# Altium PCB ref.PcbDoc
Units mm, origin at the board's own origin, x right, y up, seen from the top; angles counter-clockwise.
Board outline 43.02 x 49.94 mm, 4 copper layers (Top Layer, Internal Plane 1, Internal Plane 2, Bottom Layer), stack 0.758 mm thick; 16 components, 64 nets, 36 pads, 153 vias.
Unrouted connection lines stored in the file: 2.
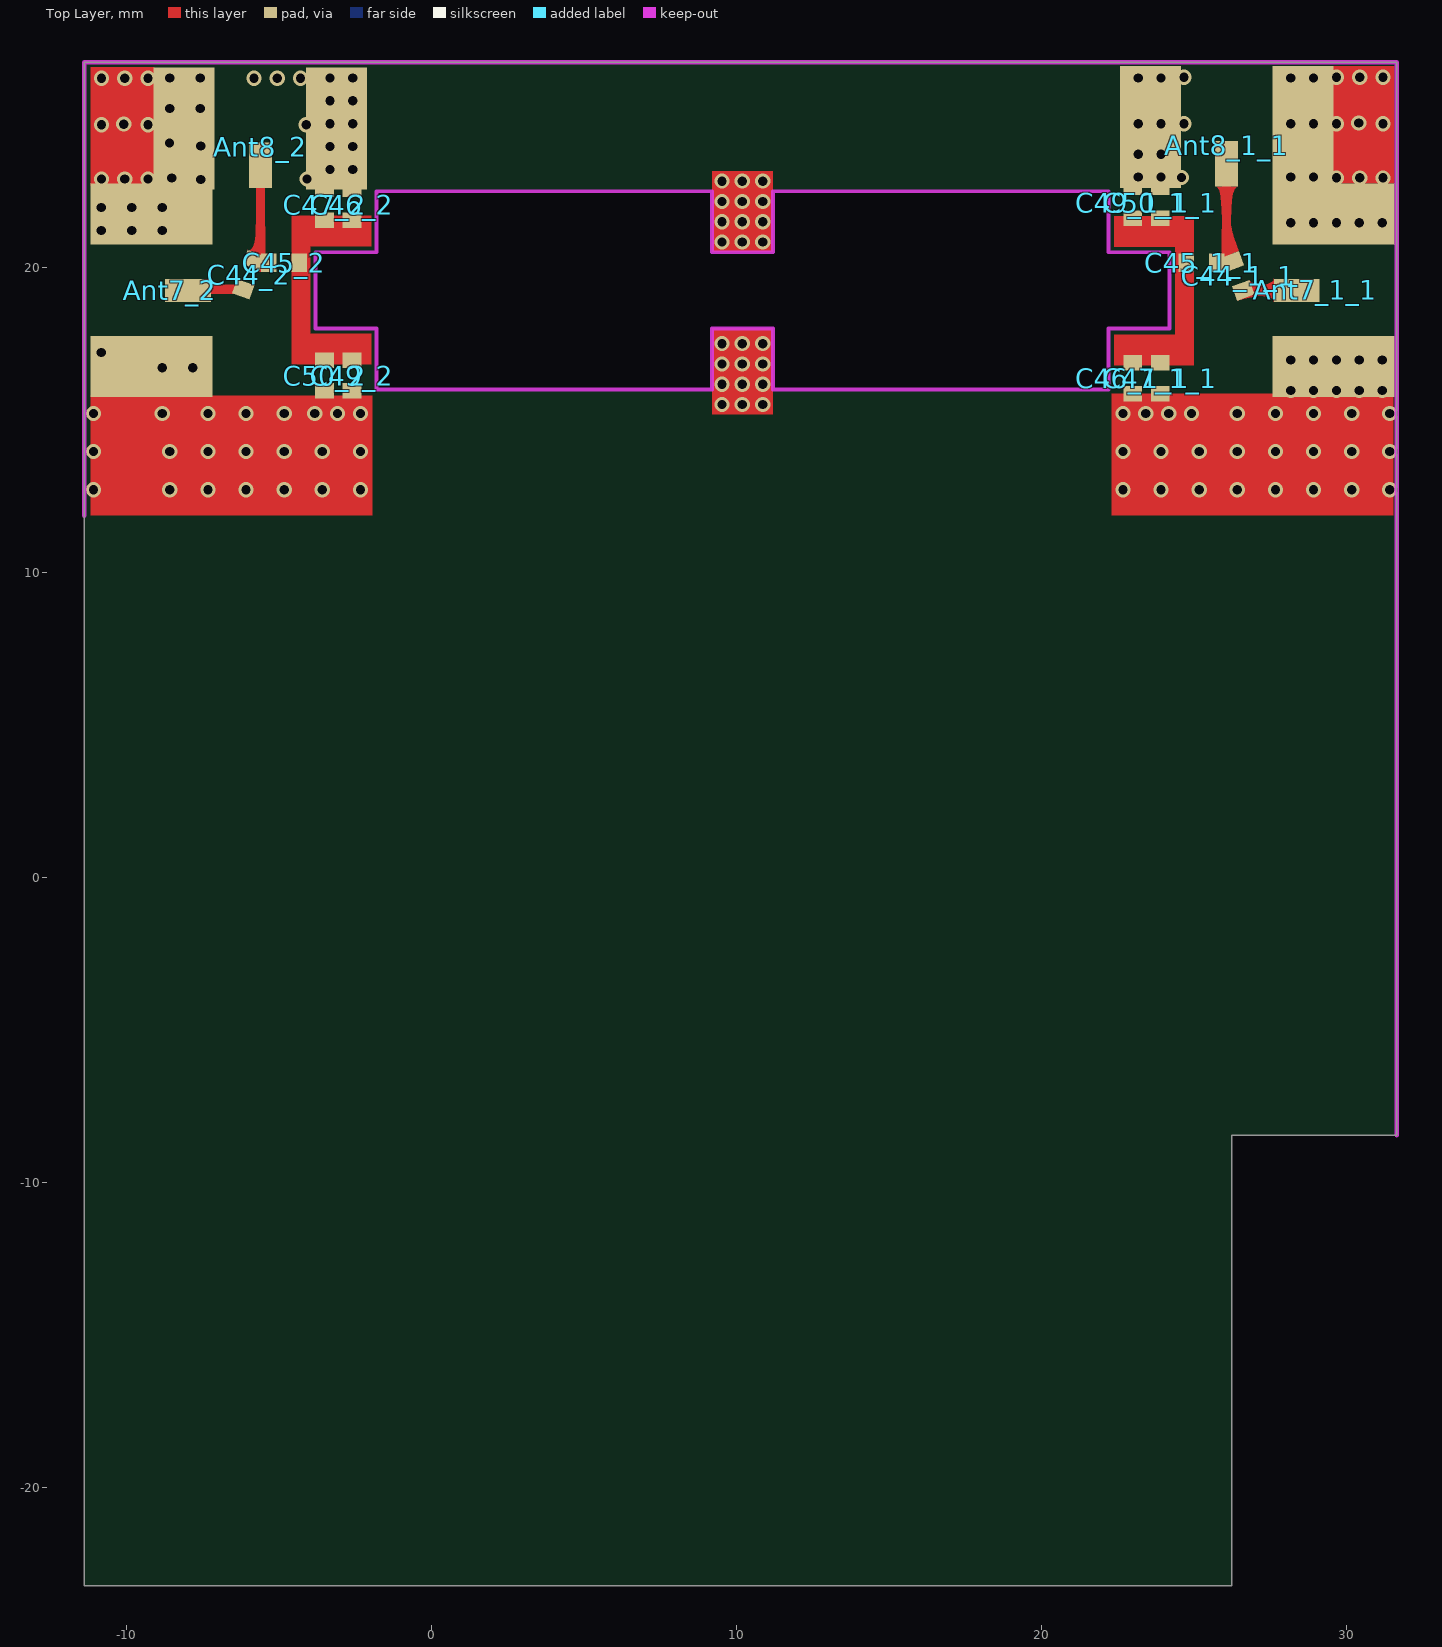
[diagram p0: Top Layer view]
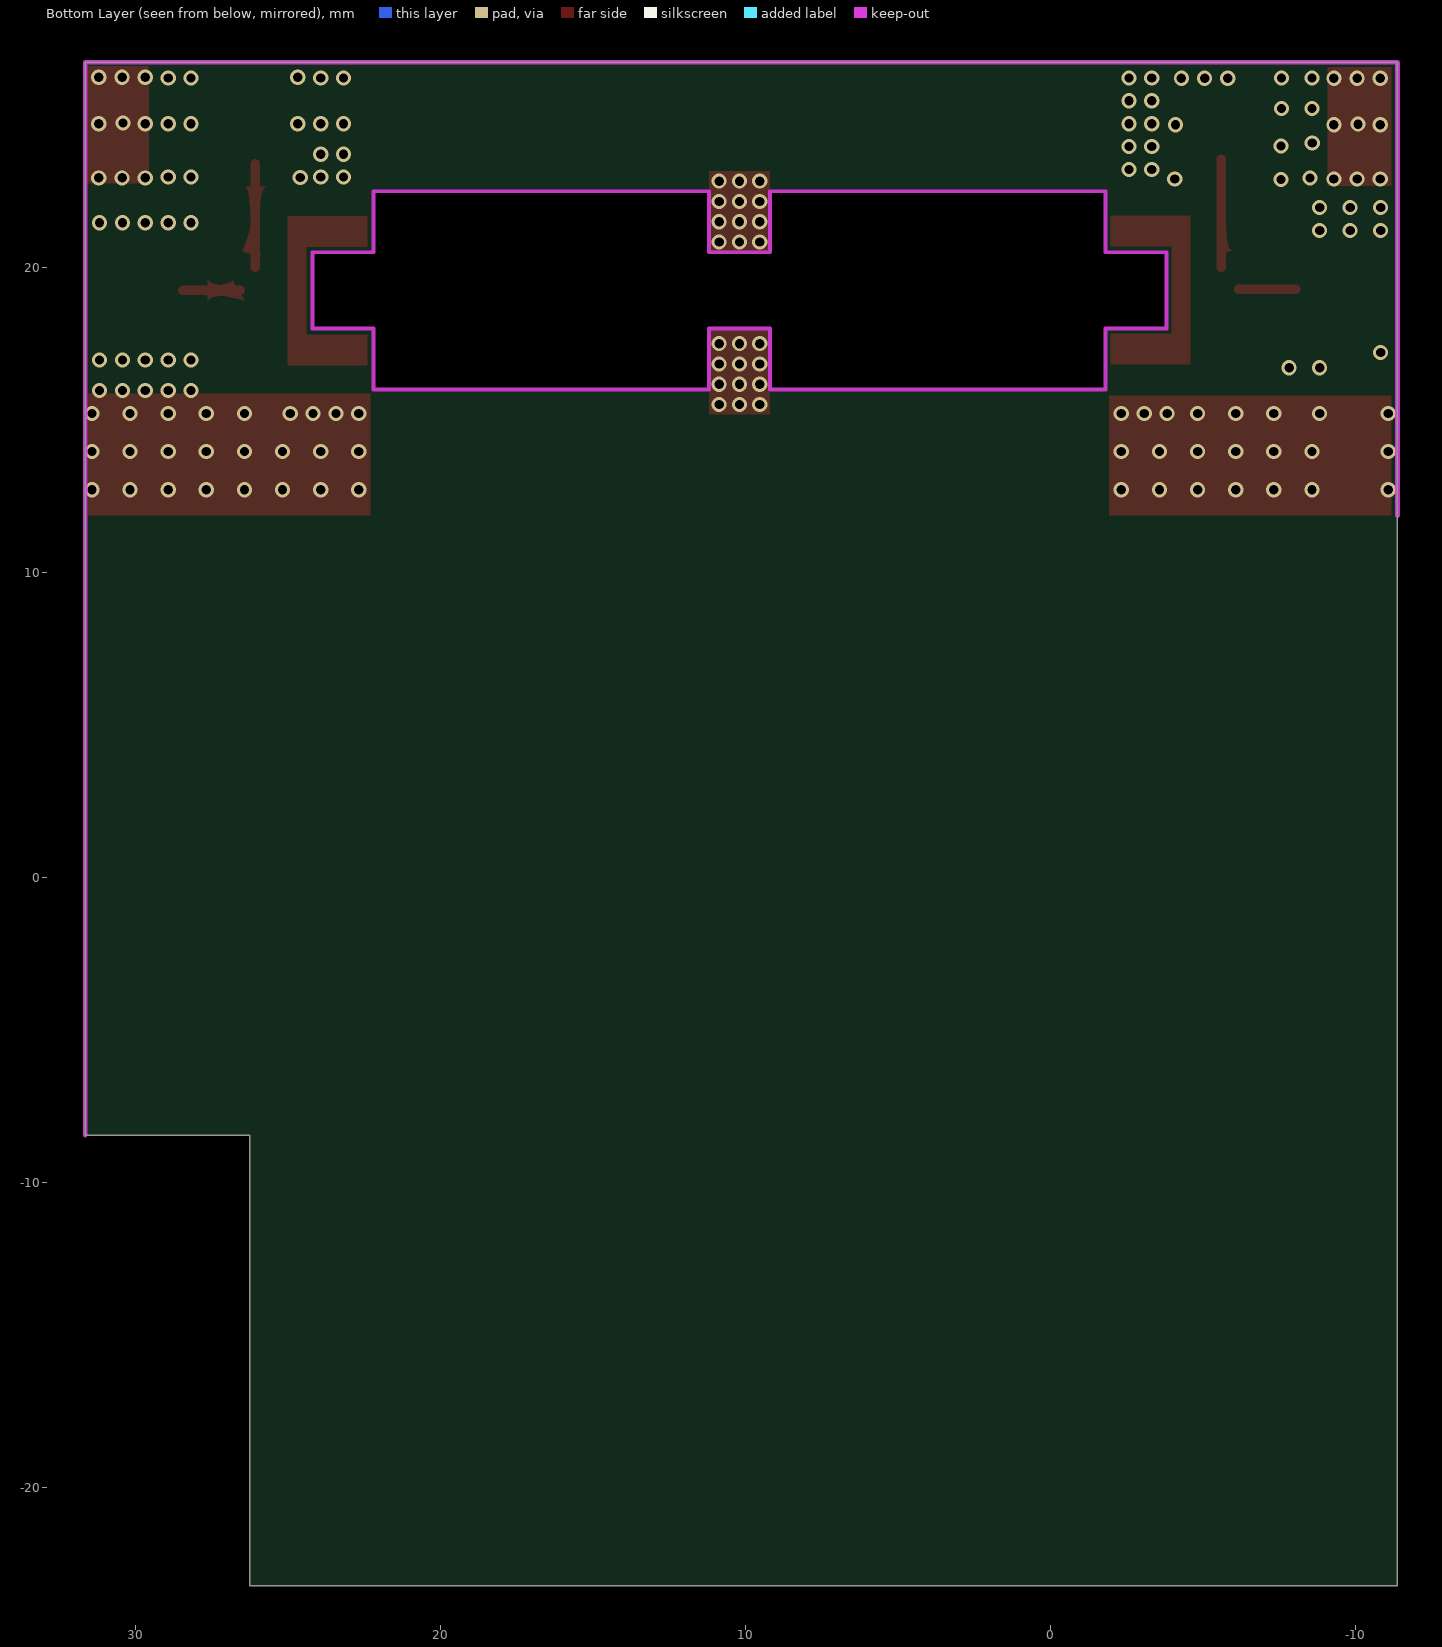
[diagram p1: Bottom Layer view, seen from below]
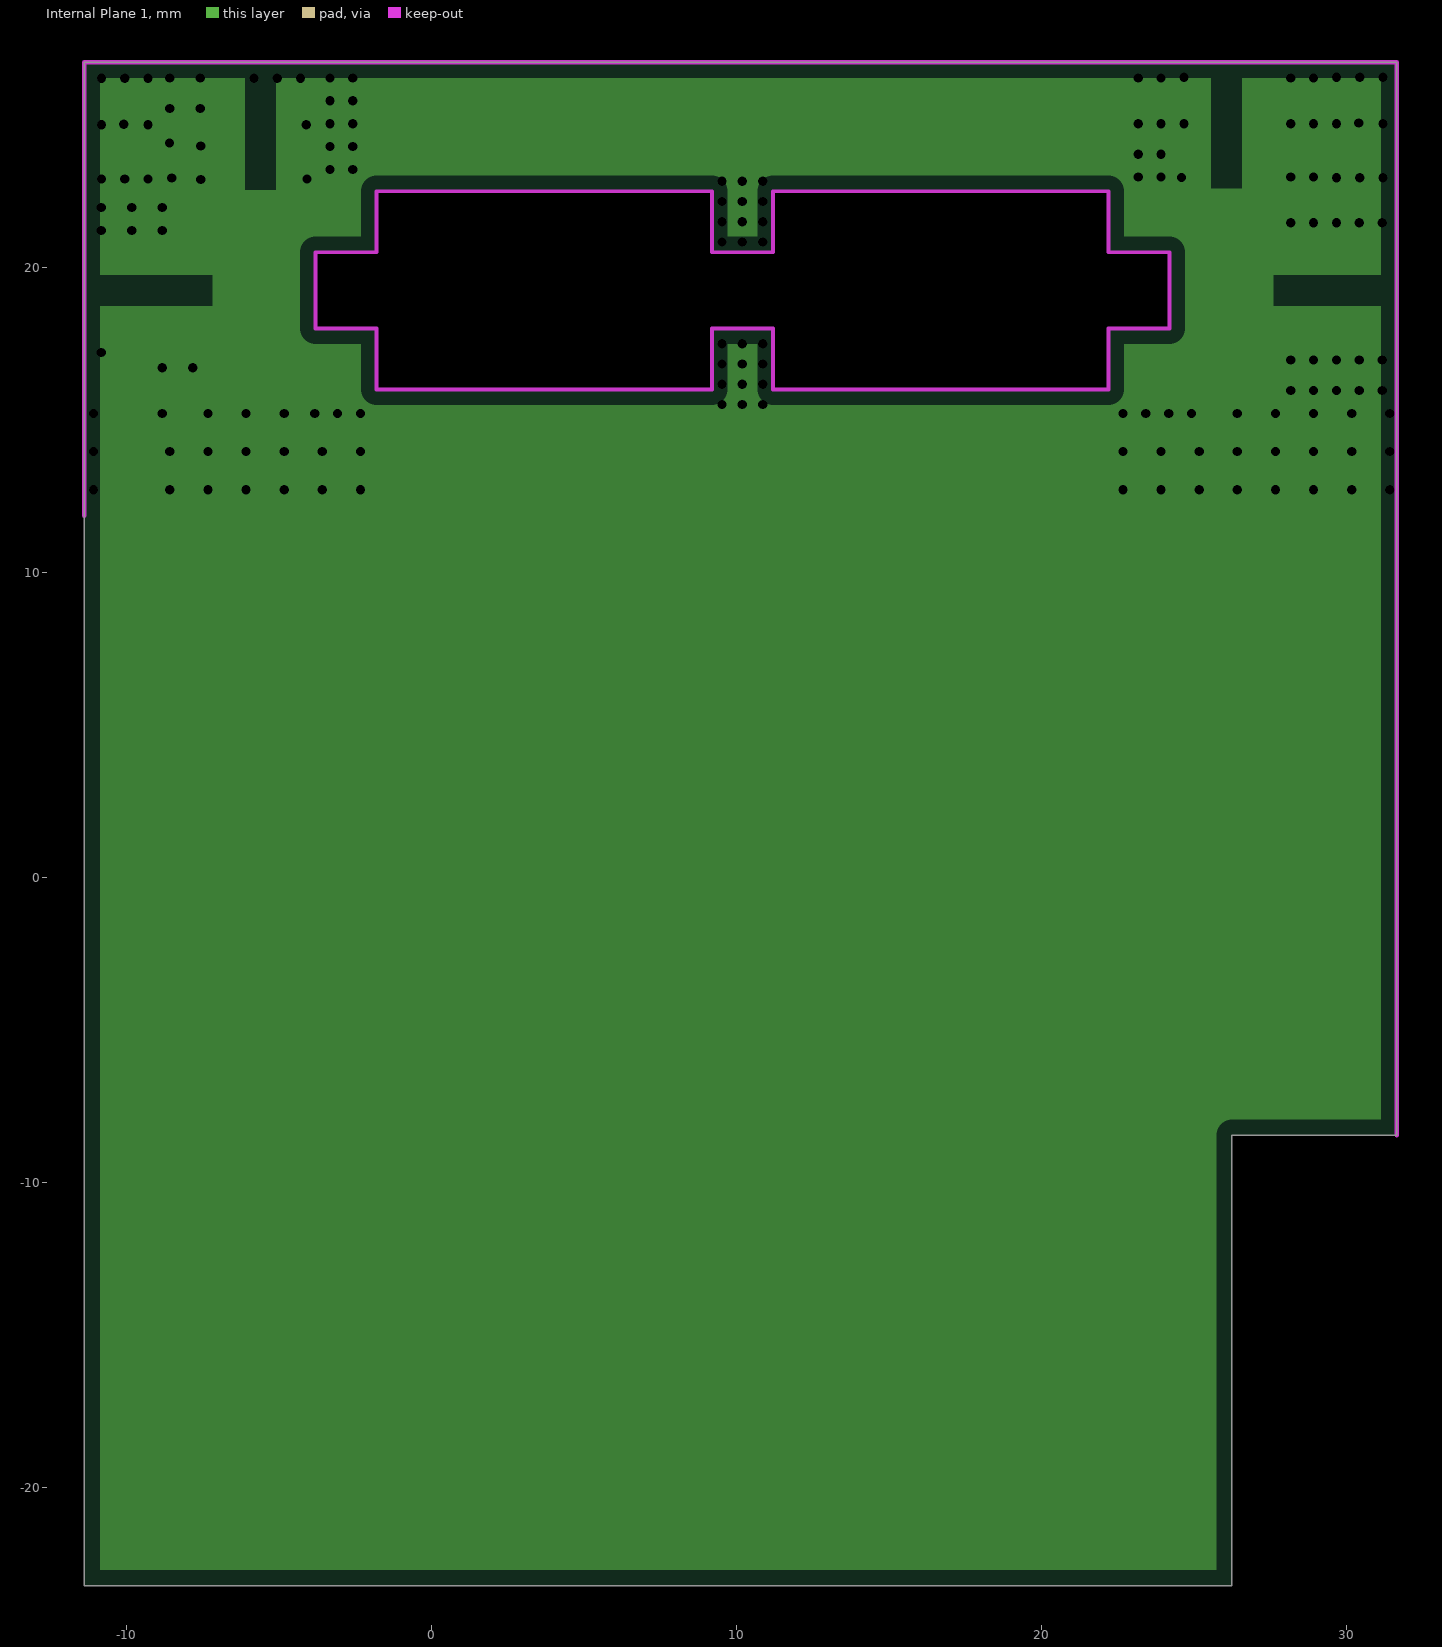
[diagram p2: Internal Plane 1, clearances drawn from the general rule]
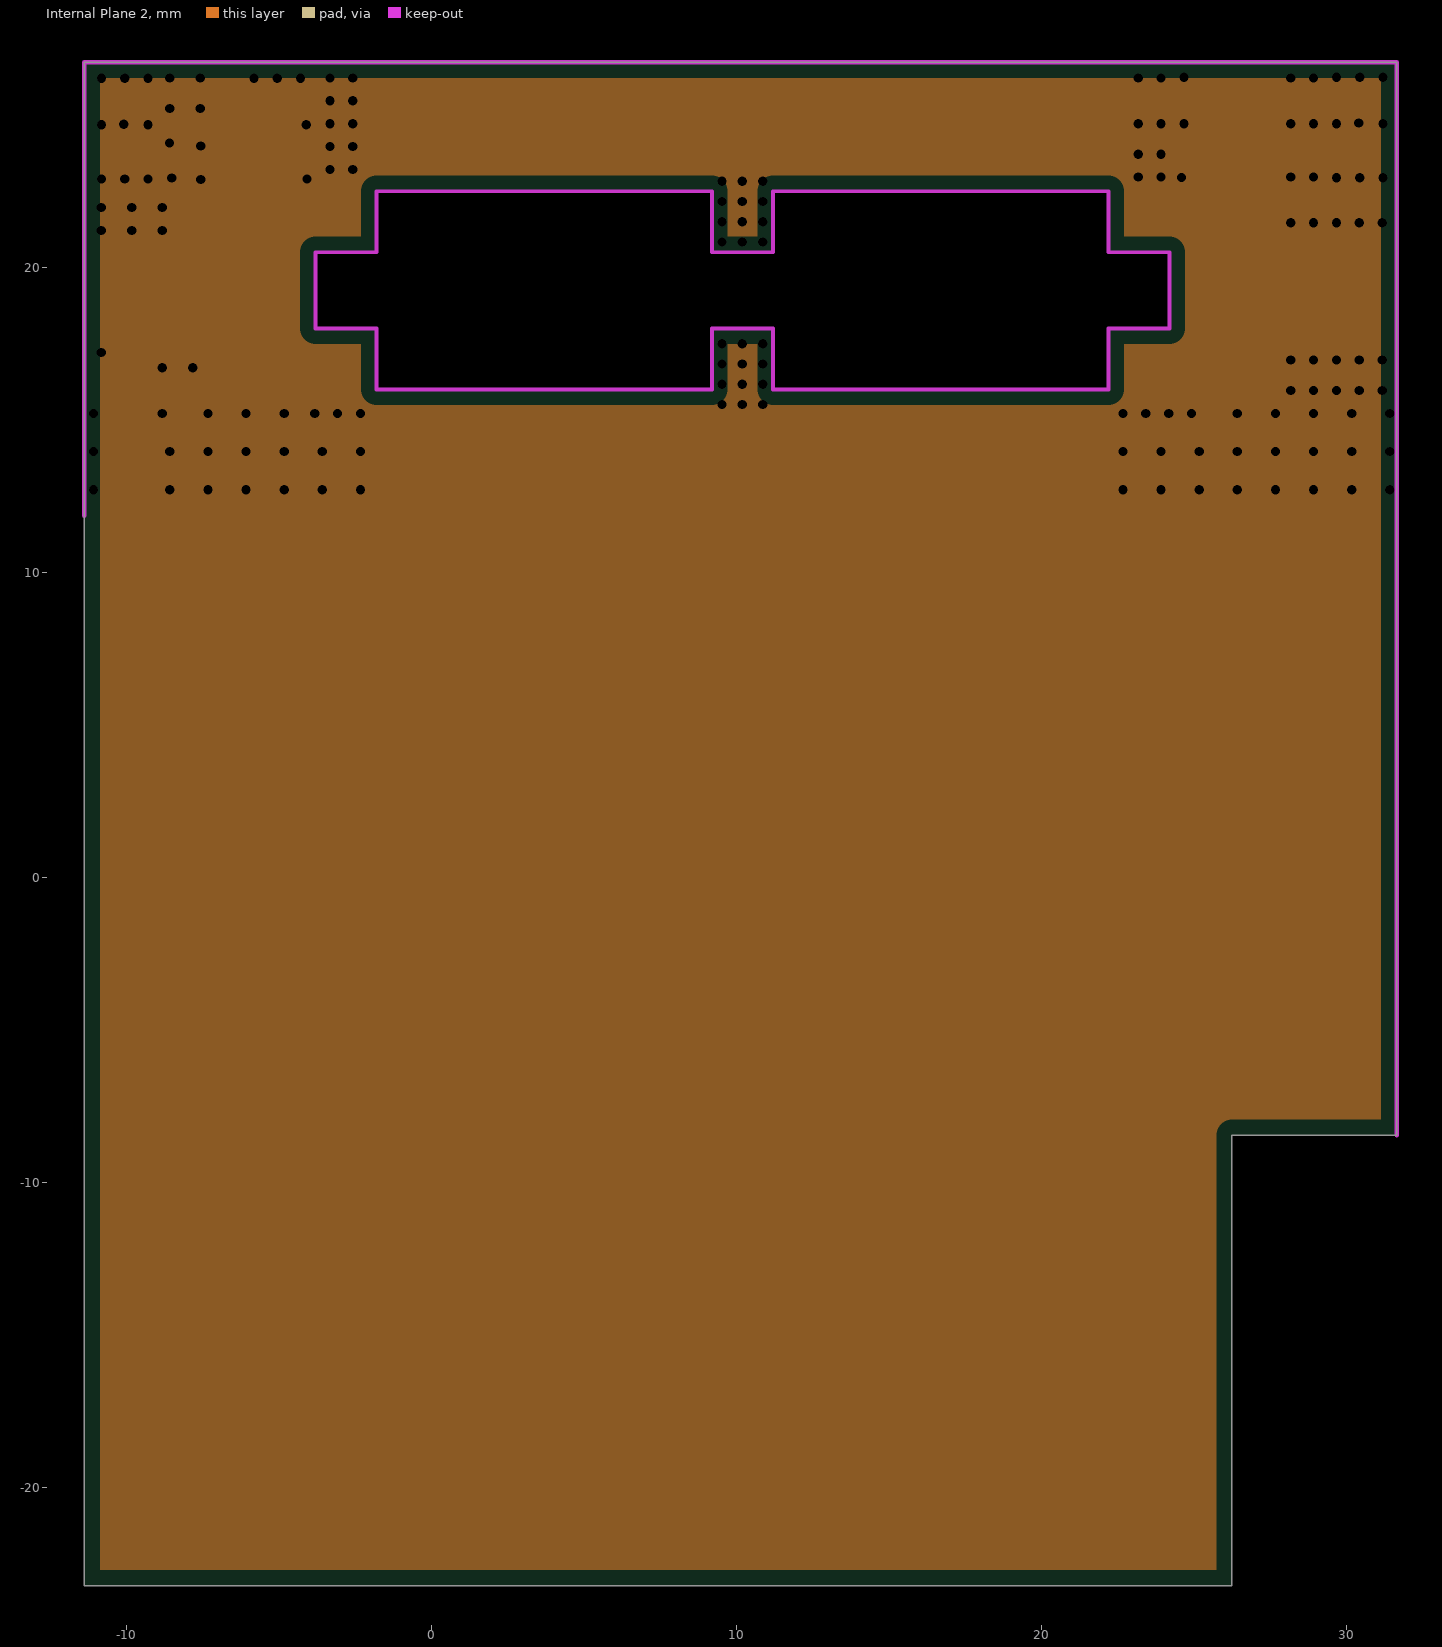
[diagram p3: Internal Plane 2, clearances drawn from the general rule]

## Layer stack, top to bottom
Top Solder: solder mask 0.0102, Solder Resist, Dk 3.8
Top Layer: signal copper 0.0356
Dielectric 1: prepreg 0.1803, Dk 4.6
Internal Plane 1: plane copper 0.036, net GND
Dielectric 3: core 0.254, Dk 4.6
Internal Plane 2: plane copper 0.036, net GND
Dielectric 4: prepreg 0.1803, Dk 4.6
Bottom Layer: signal copper 0.0356
Bottom Solder: solder mask 0.0102, Solder Resist, Dk 3.8

## Board outline
-11.391,-23.227 -11.391,26.717 31.634,26.717 31.634,-8.458 26.234,-8.458 26.234,-23.227
cut-out: 24.184,17.992 22.184,17.992 22.184,15.992 11.184,15.992 11.184,17.992 9.184,17.992 9.184,15.992 -1.816,15.992 -1.816,17.992 -3.816,17.992 -3.816,20.492 -1.816,20.492 -1.816,22.492 9.184,22.492 9.184,20.492 11.184,20.492 11.184,22.492 22.184,22.492 22.184,20.492 24.184,20.492

## Design rules (kind name [scope] priority, off if disabled: settings)
Clearance [All] p1: gap=0.152 ignorepadtopadclearanceinfootprint=FALSE except(0: Arc-Hole Track-Hole SMDPad-Hole THPad-Hole Via-Hole Fill-Hole Poly-Hole Region-Hole Text-Hole)
DiffPairsRouting [All] p1: maxlimit=0.254 minlimit=0.254 mostfreqgap=0.254 toplayer_minwidth=0.152 toplayer_maxwidth=0.381 toplayer_prefwidth=0.381 bottomlayer_minwidth=0.152 bottomlayer_maxwidth=0.381 bottomlayer_prefwidth=0.381 maxuncoupledlength=12.7
MinimumSolderMaskSliver [All] p1 off: minsoldermaskwidth=0.254
PlaneClearance [All] p1: clearance=0.254
PlaneConnect [All] p1: planeconnectstyle=Direct reliefexpansion=0.508 reliefentries=4 reliefconductorwidth=0.254 reliefairgap=0.254
PolygonConnect [All] p1: connectstyle=Direct reliefconductorwidth=0.254 reliefentries=4 polygonreliefangle="90 Angle" airgapwidth=0.254
RoomDefinition mixer [InComponentClass('mixer')] p1 off: confinementstyle=ConfineIn formatcopy=TRUE lockcomponents=FALSE outline 38.622,20.131 177.534,20.131 177.534,30.164 38.622,30.164
RoomDefinition power [InComponentClass('power')] p2 off: confinementstyle=ConfineIn formatcopy=TRUE lockcomponents=FALSE outline 38.52,-21.703 98.083,-21.703 98.083,-15.607 38.52,-15.607
RoutingVias [All] p1: holewidth=0.305 width=0.508 viastyle="Through Hole" minholewidth=0.3 minwidth=0.5 maxholewidth=0.711 maxwidth=1.27
SilkToBoardRegionClearance [All] p1 off:
SilkToSilkClearance [All] p1 off: silktosilkclearance=0.254
SilkToSolderMaskClearance [IsPad] p1 off: minsilkscreentomaskgap=0.254 clearancetoexposedcopper=TRUE
SolderMaskExpansion [All] p1: expansion=0.102
Width [All] p1: maxlimit=1.524 minlimit=0.152 preferedwidth=0.152
23 further rules are at their usual default settings.

## Classes and differential pairs
component class mixer: R28
differential pair IF1: +IF1_P -IF1_N
differential pair IF2: +IF2_P -IF2_N

## Components (designator, comment, footprint, x,y, rotation, side; value= is the part's Value field where it differs from the comment)
Ant7_1_1 "Antenna" SMA-2 29.559,16.742 r90 top (schematic designator Ant2)
Ant7_2 "Antenna" SMA-2 -9.191,21.742 r270 top (schematic designator Ant2)
Ant8_1_1 "Antenna" SMA-2 28.559,24.592 r180 top (schematic designator Ant2)
Ant8_2 "Antenna" SMA-2 -3.116,24.542 r180 top (schematic designator Ant2)
C44_1_1 "1nF" 0402 26.434,19.717 r290 top (schematic designator C43)
C44_2 "1nF" 0402 -6.007,19.75 r70 top (schematic designator C43)
C45_1_1 "1nF" 0402 25.234,20.142 r0 top (schematic designator C43)
C45_2 "1nF" 0402 -4.841,20.142 r180 top (schematic designator C43)
C46_1_1 "1nF" 0402 22.984,16.367 r270 top (schematic designator C43)
C46_2 "1nF" 0402 -2.616,22.042 r90 top (schematic designator C43)
C47_1_1 "1nF" 0402 23.884,16.367 r270 top (schematic designator C43)
C47_2 "1nF" 0402 -3.516,22.042 r90 top (schematic designator C43)
C49_1_1 "1nF" 0402 22.984,22.118 r270 top (schematic designator C43)
C49_2 "1nF" 0402 -2.616,16.442 r90 top (schematic designator C43)
C50_1_1 "1nF" 0402 23.884,22.118 r270 top (schematic designator C43)
C50_2 "1nF" 0402 -3.516,16.442 r90 top (schematic designator C43)

## Footprints (in the part's own frame and the unit in brackets; to place one, negate y for a bottom-side part, rotate by r counter-clockwise, add the part's x,y. Pads: shape width x height; smd on the part's side, far side on the other; paste and mask are expansions set on the pad)
0402 [mil] "0402-RES"
  rect 20x24 smd: 1(-19.68,0) 2(20,0)
SMA-2 [mm]
  rect 0.75x1.5 smd: 1(2.5,1.2)
  rect 2x4 smd: GND(0,0) GND(5,0)
  Top Layer pour cut-out: 1,2 4,2 4,-2 1,-2

## Part data
C44_1_1 C44_2 C45_1_1 C45_2 C46_1_1 C46_2 C47_1_1 C47_2 C49_1_1 C49_2 C50_1_1 C50_2: library part CAP0402-CAP, "<b>Capacitor</b> / Standard 0603 ceramic capacitor, and 0.1\" leaded capacitor."

## Via types
v1: diameter 0.5, hole 0.305, Top Layer to Bottom Layer, tented both sides, 149 vias
v2: diameter 0.5, hole 0.3, Top Layer to Bottom Layer, 4 vias

## Nets (pads, with @x,y where several pads share a name; then routed paths per layer and width w, separated by ;. In a path a pad name is that pad's centre, name@x,y a point inside that pad or via, vN(x,y) a via of type N, cw(c..) or ccw(c..) an arc to the next point about the centre after c; other vN are vias at no path point)
5V: 
5V-MIXER: Ant7_1_1.1 C44_1_1.2 | length 1.9
  Top Layer w0.305: C44_1_1.2@26.546,19.242 Ant7_1_1.1@28.434,19.242
5VA: 
5VB: 
6V: 
-3.3V: 
DETO: Ant8_1_1.1 C44_1_1.1 C44_2.2 C45_1_1.2 C45_2.2 | length 6.9
  Top Layer w0.305: C44_2.2@-5.616,19.992 -5.616,23.542 ; C44_1_1.1@26.059,19.992 Ant8_1_1.1
GND: Ant7_1_1.GND Ant7_2.GND Ant8_1_1.GND Ant8_2.1 Ant8_2.GND C46_1_1.2 C46_2.2 C47_1_1.2 C47_2.2 C49_1_1.1 C49_2.1 C50_1_1.1 C50_2.1
  other v1: -11.089,12.707 -8.589,12.707 -7.339,12.707 -6.089,12.707 -4.839,12.707 -3.589,12.707 -2.339,12.707 22.661,12.707 23.911,12.707 25.161,12.707 26.411,12.707 27.661,12.707 28.911,12.707 30.161,12.707 31.411,12.707 -11.089,13.957 -8.589,13.957 -7.339,13.957 -6.089,13.957 -4.839,13.957 -3.589,13.957 -2.339,13.957 22.661,13.957 23.911,13.957 25.161,13.957 26.411,13.957 27.661,13.957 28.911,13.957 30.161,13.957 31.411,13.957 -11.089,15.207 -8.839,15.207 -7.339,15.207 -6.089,15.207 -4.839,15.207 -3.839,15.207 -3.089,15.207 -2.339,15.207 22.661,15.207 23.411,15.207 24.161,15.207 24.911,15.207 26.411,15.207 27.661,15.207 28.911,15.207 30.161,15.207 31.411,15.207 9.517,15.497 10.183,15.497 10.849,15.497 28.161,15.957 28.911,15.957 29.661,15.957 30.411,15.957 31.161,15.957 9.517,16.163 10.183,16.163 10.849,16.163 -8.839,16.707 -7.839,16.707 9.517,16.829 10.183,16.829 10.849,16.829 28.161,16.957 28.911,16.957 29.661,16.957 30.411,16.957 31.161,16.957 -10.839,17.207 9.517,17.495 10.183,17.495 10.849,17.495 9.517,20.825 10.183,20.825 10.849,20.825 -10.839,21.207 -9.839,21.207 -8.839,21.207 28.161,21.457 28.911,21.457 29.661,21.457 30.411,21.457 31.161,21.457 9.517,21.491 10.183,21.491 10.849,21.491 -10.839,21.957 -9.839,21.957 -8.839,21.957 9.517,22.157 10.183,22.157 10.849,22.157 9.517,22.823 10.183,22.823 10.849,22.823 -10.831,22.893 -10.069,22.893 -9.307,22.893 -4.091,22.892 29.661,22.929 30.423,22.929 31.185,22.929 23.161,22.957 23.911,22.957 24.584,22.942 28.161,22.957 28.911,22.957 -3.339,23.207 -2.589,23.207 23.161,23.707 23.911,23.707 -3.339,23.957 -2.589,23.957 -10.831,24.671 -9.307,24.671 -4.116,24.667 -10.098,24.692 -3.339,24.707 -2.589,24.707 23.161,24.707 23.911,24.707 24.661,24.707 28.161,24.707 28.911,24.707 29.661,24.707 31.185,24.707 30.394,24.728 -8.589,25.207 -7.589,25.207 -3.339,25.457 -2.589,25.457 -10.831,26.195 -10.069,26.195 -9.307,26.195 -8.589,26.207 -7.589,26.207 -5.831,26.195 -5.069,26.195 -4.307,26.195 -3.339,26.207 -2.589,26.207 23.161,26.207 23.911,26.207 28.161,26.207 28.911,26.207 24.661,26.231 29.661,26.231 30.423,26.231 31.185,26.231
  other v2: -7.575,22.875 -8.525,22.925 -7.575,23.975 -8.6,24.075
IF1_N: 
IF1_P: 
IF2_N: 
IF2_P: 
IF3+: 
IF3-: 
NetAnt1_1: 
NetAnt2_1: 
NetC1_1: 
NetC1_2: 
NetC2_1: 
NetC4_1: 
NetC7_2: 
NetC11_2: 
NetC15_2: 
NetC18_2: 
NetC24_2: 
NetC28_1: 
NetC28_2: 
NetC29_1: 
NetC30_1: 
NetC30_2: 
NetC31_1: 
NetC31_2: 
NetC43_2: 
NetC44_1: 
NetC44_2: 
NetC45_2: 
NetC46_1: 
NetC46_2: 
NetC47_2: 
NetC48_2: 
NetC49_1: 
NetC49_2: 
NetC50_1: 
NetC50_2: 
NetC51_2: 
NetC53_2: 
NetC57_1: 
NetC57_2: 
NetC58_1: 
NetC58_2: 
NetC59_1: 
NetC59_2: 
NetC60_1: 
NetC60_2: 
NetC64_2: 
NetC66_2: 
NetR2_1: 
NetR4_1: 
NetR5_1: 
NetR10_1: 
NetR15_1: 
NetR24_1: 
VSET: 
VSYS: 
pads on no net: Ant7_2.1 C44_2.1 C45_1_1.1 C45_2.1 C46_1_1.1 C46_2.1 C47_1_1.1 C47_2.1 C49_1_1.2 C49_2.2 C50_1_1.2 C50_2.2
copper on no net: | length 1.9
  Top Layer w0.305: -8.066,19.28 -6.178,19.28

## Polygon pours and split planes (outlines as drawn)
GND on Internal Plane 1 (split plane): 31.124,19.742 27.613,19.742 27.613,18.742 31.124,18.742 31.124,-7.948 26.234,-7.948 26.134,-7.957 26.039,-7.986 25.95,-8.034 25.873,-8.097 25.81,-8.174 25.762,-8.263 25.733,-8.358 25.724,-8.458 25.724,-22.717 -10.881,-22.717 -10.881,18.742 -7.195,18.742 -7.195,19.742 -10.881,19.742 -10.881,26.207 -6.116,26.207 -6.116,22.546 -5.116,22.546 -5.116,26.207 25.559,26.207 25.559,22.596 26.559,22.596 26.559,26.207 31.124,26.207
GND on Internal Plane 2 (split plane): 31.124,-7.948 26.234,-7.948 26.134,-7.957 26.039,-7.986 25.95,-8.034 25.873,-8.097 25.81,-8.174 25.762,-8.263 25.733,-8.358 25.724,-8.458 25.724,-22.717 -10.881,-22.717 -10.881,26.207 31.124,26.207

## Keep-outs
Keep-Out Layer:
  lines w0.127: -3.816,17.992 -1.816,17.992 -1.816,15.992 9.184,15.992 9.184,17.992 11.184,17.992 11.184,15.992 22.184,15.992 22.184,17.992 24.184,17.992 24.184,20.492 22.184,20.492 22.184,22.492 11.184,22.492 11.184,20.492 9.184,20.492 9.184,22.492 -1.816,22.492 -1.816,20.492 -3.816,20.492 -3.816,17.992
  lines w0.152: -11.391,11.85 -11.391,26.717 31.634,26.717 31.634,-8.458

## Other copper
Top Layer:
  rectangle net GND: -11.191,22.667 -9.091,26.567
  rectangle net GND: 29.534,22.742 31.559,26.592
  rectangle net GND: 22.284,11.867 31.534,15.867
  region net GND: -1.941,15.792 -11.191,15.792 -11.191,11.867 -1.941,11.867
  rectangle net GND: 9.184,20.492 11.184,23.156
  rectangle net GND: 9.184,15.164 11.184,17.992
  region: -1.991,20.692 -3.991,20.692 -3.991,17.817 -1.991,17.817 -1.991,16.817 -4.591,16.817 -4.591,21.692 -1.991,21.692
  region: 22.384,17.792 24.384,17.792 24.384,20.667 22.384,20.667 22.384,21.667 24.984,21.667 24.984,16.792 22.384,16.792
Internal Plane 1 (plane layer: these items are gaps in the copper):
  region: -7.195,19.742 -11.259,19.742 -11.259,18.742 -7.195,18.742
  region: -5.116,22.546 -5.116,26.61 -6.116,26.61 -6.116,22.546
  region: 26.559,22.596 26.559,26.66 25.559,26.66 25.559,22.596
  rectangle: 27.613,18.742 31.677,19.742

## Silkscreen, mask and mechanical layers (free items; w line width, h text height)
Top Solder:
  rectangle: 9.184,20.492 11.184,23.156
  rectangle: 9.184,15.164 11.182,17.992
  region: -1.916,14.742 -11.316,14.742 -11.316,26.592 -1.916,26.592 -1.916,19.642 -4.816,19.642 -4.816,18.842 -1.916,18.842
  region: 22.284,26.667 31.684,26.667 31.684,14.492 22.284,14.492 22.284,18.918 25.184,18.918 25.184,19.718 22.284,19.718